# Altium PCB dieukhien.PcbDoc (part 3 of 3)
Units mil, origin at the board's own origin, x right, y up, seen from the top; angles counter-clockwise.
Board outline 7680 x 3350 mil, 2 copper layers (Top Layer, Bottom Layer); 551 components, 172 nets, 1771 pads, 0 vias.
Unrouted connection lines stored in the file: 181.
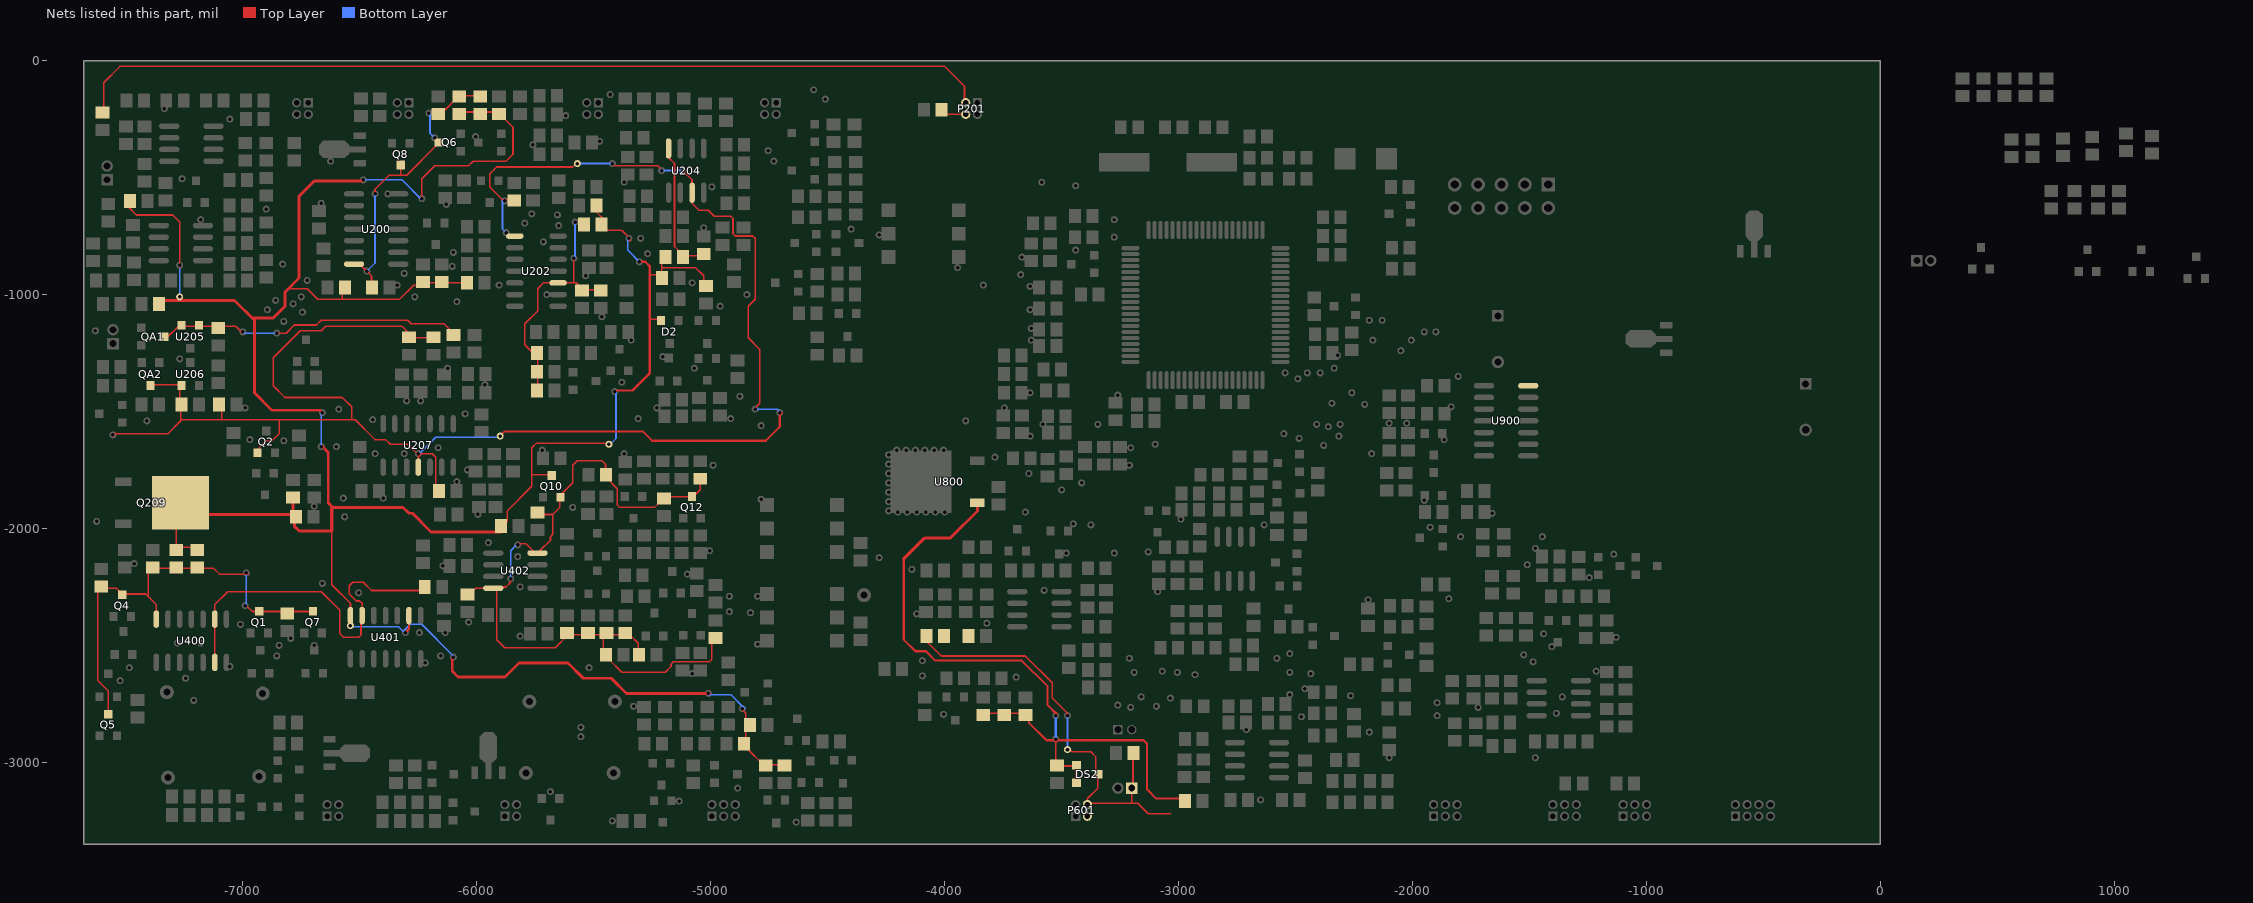
[diagram p3: the nets of this part, all layers, seen from the top]

## Nets (pads, with @x,y where several pads share a name; then routed paths per layer and width w, separated by ;. In a path a pad name is that pad's centre, name@x,y a point inside that pad or via, vN(x,y) a via of type N, cw(c..) or ccw(c..) an arc to the next point about the centre after c; other vN are vias at no path point) (continued)
U401-13: R61.1 U400.6 U400.9 U401.13 | length 1538.6
  Top Layer w7: U400.6@-7120,-2555 -7120,-2325 -7065,-2270 -6665,-2270 -6585,-2350 -6585,-2450 -6570,-2465 -6505,-2465 -6495,-2455 U401.13@-6495,-2400 ; U401.13@-6490,-2350 -6490,-2320 -6500,-2310 -6515,-2310 -6545,-2280 -6545,-2245 -6530,-2230 -6485,-2230 -6450,-2265 R61.1@-6240,-2265
V+1: P201.4 R277.1 | length 89.1
  Top Layer w7: R277.1@-4000,-220 -3990,-230 P201.4@-3915,-230
V+2: P201.3 R6.2 | length 3924.2
  Top Layer w7: R6.2@-7595,-205 -7595,-95 -7525,-25 -4000,-25 -3915,-110 P201.3@-3915,-180
VCC: C119.1 C636.1 DS2.3 P601.3 P601.4 pad.0@-3475,-2945 R187.2 U900.14 | length 1894.5
  Top Layer w7: R187.2@-4080,-2475 -4080,-2480 -4015,-2545 -3655,-2545 -3540,-2660 -3540,-2725 -3475,-2790 -3475,-2795 ; pad.0@-3475,-2935 -3455,-2955 -3375,-2955 -3355,-2975 DS2.3@-3355,-3045 ; P601.4@-3395,-3180 P601.4@-3390,-3175 ; DS2.3@-3345,-3050 -3345,-3110 -3390,-3155 P601.4@-3390,-3175 ; -3200,-3175 C636.1@-3200,-3115 ; C636.1@-3200,-3100 -3195,-3095 C119.1@-3195,-2965 ; -3035,-3220 -3130,-3220 -3175,-3175 P601.4@-3390,-3175
  Bottom Layer w6.5: P601.3@-3390,-3230 P601.4@-3390,-3175
  Bottom Layer w9: -3475,-2930 -3475,-2800
VCC12: C98.2 R187.1
VCC13: C118.2 DS2.1 DS2.2 R197.1 R198.1 R199.1 R210.2 U800.1 | length 3100.2
  Top Layer w7: R198.1@-3825,-2790 R197.1@-3655,-2790 ; C118.2@-3530,-3010 -3525,-3015 DS2.1@-3435,-3015 ; C118.2@-3525,-3010 -3525,-2905 ; DS2.2@-3440,-3090 DS2.1@-3440,-3010
  Top Layer w9: -4175,-2130 -4175,-2475 -4125,-2525 -4080,-2525 -4040,-2565 -3670,-2565 -3560,-2675 -3560,-2755 -3520,-2795 -3520,-2800 ; R197.1@-3640,-2800 -3640,-2830 -3565,-2905 -3425,-2905 -3150,-2905 -3135,-2920 -3135,-3115 -3095,-3155 R210.2@-2985,-3155
  Top Layer w13: -4175,-2130 -4085,-2040 -3975,-2040 -3860,-1925 U800.1@-3860,-1895
  Bottom Layer w9: -3525,-2900 -3525,-2800
VDD: C12.2 D2.2 pad.0@-5435,-1640 pad.0@-6540,-2415 pad.0@-7270,-1010 Q10.3 Q209.4 R8.1 R20.1 R29.1 R49.2 R50.2 R63.2 R67.1 R68.1 R69.1 R78.1 R79.1 R87.2 R88.1 R89.1 R99.2 R110.2 R111.2 R142.1 R143.2 R144.2 R145.2 R278.1 U401.9 U401.14 | length 11983.3
  Top Layer w7: R8.1@-7490,-605 -7490,-625 -7455,-660 -7300,-660 -7270,-690 -7270,-885 ; Q209.4@-7285,-1960 -7285,-2075 -7280,-2080 R50.2@-7205,-2080 ; -6800,-975 -6725,-975 -6680,-1020 -6330,-1020 -6270,-960 -6220,-960 -6210,-950 R87.2@-6045,-950 ; C12.2@-6785,-1940 C12.2@-6780,-1945 ; -6620,-1985 -6620,-2240 -6540,-2320 U401.14@-6540,-2350 ; -6575,-1020 R278.1@-6575,-980 ; -6235,-590 -6235,-505 -6180,-450 -6035,-450 -6015,-430 -5875,-430 -5845,-400 -5845,-285 -5910,-220 R67.1@-6055,-220 ; R63.2@-5895,-1995 -5870,-1970 -5870,-1925 -5765,-1820 -5765,-1655 -5745,-1635 pad.0@-5435,-1635 ; -5765,-1770 Q10.3@-5685,-1770 ; R78.1@-5490,-620 -5490,-645 -5455,-680 R79.1@-5455,-685 ; R79.1@-5455,-725 -5380,-725 -5345,-760 -5345,-770 ; -5260,-915 -5215,-915 -5210,-910 R99.2@-5210,-835 ; -5255,-1105 D2.2@-5210,-1105 ; -5210,-885 -5065,-885 -5030,-920 R111.2@-5030,-945 ; -4865,-2775 -4850,-2790 -4850,-2935 -4770,-3015 R144.2@-4770,-3020 ; R144.2@-4760,-3010 R145.2@-4695,-3010
  Top Layer w10: -6305,-2445 -6290,-2430 U401.9@-6290,-2380 ; -5405,-1410 -5335,-1410 -5260,-1335 -5260,-1105 -5260,-880 -5280,-860 -5295,-860
  Top Layer w12: R20.1@-7350,-1025 -7035,-1025 -6950,-1110 -6950,-1420 -6875,-1495 -6670,-1495 -6660,-1505 ; -6960,-1100 -6870,-1100 -6820,-1050 -6820,-990 -6760,-930 -6760,-580 -6695,-515 -6490,-515 ; -6660,-1650 -6635,-1675 -6635,-1890 -6615,-1910 -6315,-1910 -6290,-1935 -6275,-1935 -6195,-2015 R63.2@-5895,-2015 ; -6105,-2555 -6105,-2610 -6080,-2635 -5880,-2635 -5820,-2575 -5610,-2575 -5545,-2640 -5425,-2640 -5360,-2705 -5005,-2705
  Top Layer w13: Q209.4@-7160,-1925 -7145,-1940 -6785,-1940 R29.1@-6785,-1875 ; C12.2@-6780,-1975 -6780,-1990 -6760,-2010 -6620,-2010 -6620,-1910
  Bottom Layer w7: pad.0@-7270,-1005 -7270,-875 ; pad.0@-6540,-2420 -6335,-2420 -6310,-2445 -6310,-2435 -6285,-2410 -6235,-2410 -6100,-2545 -6100,-2555 ; -6490,-510 -6320,-510 -6235,-595 ; pad.0@-5435,-1645 -5405,-1615 -5405,-1410 ; -5355,-755 -5355,-810 -5305,-860 ; -5010,-2710 -4915,-2710 -4855,-2770
  Bottom Layer w7.87: -6665,-1650 -6665,-1505
VDD1: C19.1 C21.1 C23.2 Q1.3 Q4.3 Q5.3 Q7.3 R49.1 R50.1 U400.14 | length 1852.5
  Top Layer w7: C21.1@-7625,-2270 -7610,-2255 -7540,-2255 -7515,-2280 -7415,-2280 -7370,-2325 U400.14@-7370,-2370 ; C21.1@-7620,-2250 -7620,-2650 -7575,-2695 Q5.3@-7575,-2785 ; -7405,-2290 C19.1@-7405,-2175 ; C19.1@-7385,-2170 -7125,-2170 -7100,-2195 -6975,-2195 ; -6980,-2335 -6960,-2355 Q7.3@-6695,-2355
  Bottom Layer w7: -6985,-2325 -6985,-2190
VDD12: C33.1 C133.2 Q6.3 Q8.3 R67.2 R68.2 U200.14 | length 1091.7
  Top Layer w7: U200.14@-6500,-870 -6450,-920 C133.2@-6450,-960 ; -6435,-565 -6435,-550 -6375,-490 -6300,-490 -6170,-360 Q6.3@-6170,-350 ; -6325,-490 Q8.3@-6325,-450 ; C33.1@-6140,-210 -6135,-210 R67.2@-6095,-170 ; R67.2@-6065,-150 R68.2@-6000,-150
  Bottom Layer w7: -6465,-895 -6435,-865 -6435,-575 ; -6200,-225 -6200,-310 -6180,-330
VDD13: C48.1 R99.1 U204.8 | length 526.9
  Top Layer w7: U204.8@-5180,-415 -5155,-440 -5155,-795 -5140,-810 -5115,-835 C48.1@-5035,-835
VDD14: C37.2 R79.2 R81.2 R102.2 R103.2 R104.2 U202.3 | length 1046.3
  Top Layer w7: R104.2@-5740,-1410 -5740,-1270 -5795,-1215 -5795,-1125 -5740,-1070 -5740,-975 -5715,-950 U202.3@-5675,-950 ; U202.3@-5625,-955 -5620,-950 -5575,-950 R81.2@-5560,-965 ; R81.2@-5530,-985 -5525,-980 C37.2@-5470,-980 ; -5585,-950 -5585,-845 -5585,-950
  Bottom Layer w7: -5580,-840 -5580,-695
VDD15: C27.2 C52.1 C54.1 C57.1 Q10.2 Q12.3 R115.2 R117.1 R120.1 R121.1 R133.1 R134.2 R135.2 R279.2 U402.4 U402.8 | length 3222.5
  Top Layer w7: C27.2@-6035,-2285 -6005,-2255 U402.4@-5955,-2255 ; U402.4@-5915,-2255 -5915,-2475 -5880,-2510 -5665,-2510 -5610,-2455 -5345,-2455 -5310,-2490 R135.2@-5310,-2530 ; U402.4@-5900,-2250 -5875,-2250 -5855,-2230 -5855,-2220 ; -5820,-2065 -5790,-2065 U402.8@-5750,-2105 ; U402.8@-5735,-2100 -5685,-2050 -5685,-2035 -5675,-2025 -5675,-1940 ; R115.2@-5720,-1935 -5715,-1940 -5675,-1940 ; R134.2@-5460,-2530 R120.1@-5460,-2460 ; R134.2@-5440,-2560 -5435,-2560 -5380,-2615 -5205,-2615 -5195,-2615 -5170,-2590 -5170,-2580 -5160,-2570 -5005,-2570 -4995,-2560 -4995,-2495 -4985,-2485 R133.1@-4975,-2485 ; Q12.3@-5080,-1865 -5195,-1865 -5240,-1910 -5390,-1910 -5400,-1900 -5400,-1830 -5450,-1780 -5450,-1725 -5465,-1710 -5570,-1710 -5590,-1730 -5590,-1805 -5645,-1860 -5645,-1910 -5675,-1940 ; Q12.3@-5075,-1865 -5045,-1835 C57.1@-5045,-1795
  Bottom Layer w7: -5855,-2215 -5855,-2095 -5830,-2070
VREF1: C14.2 QA1.3 R46.2 U205.1 U205.2 | length 1300.8
  Top Layer w7: QA1.3@-7335,-1185 -7325,-1185 -7275,-1135 -7030,-1135 -7000,-1165 ; -6845,-1165 -6815,-1165 -6780,-1130 -6685,-1130 -6665,-1110 -6295,-1110 -6280,-1125 -6140,-1125 R46.2@-6095,-1170
  Bottom Layer w7: -6995,-1165 -6860,-1165
VREF2: C15.2 pad.0@-5570,-440 pad.0@-5900,-1605 Q2.1 QA2.3 R25.2 R35.2 R44.2 R45.2 R74.1 U202.8 U204.3 U206.1 U207.4 | length 7680.5
  Top Layer w7: -7555,-1605 -7545,-1595 -7320,-1595 -7265,-1540 ; QA2.3@-7390,-1385 -7275,-1385 -7270,-1390 -7270,-1480 -7265,-1485 -7265,-1540 ; -7090,-1535 C15.2@-7090,-1480 ; Q2.1@-6935,-1670 -6935,-1660 -6900,-1625 -6875,-1625 -6845,-1595 -6845,-1535 ; -6535,-1535 -6535,-1480 -6575,-1440 -6820,-1440 -6870,-1390 -6870,-1270 -6755,-1155 -6665,-1155 -6645,-1135 -6320,-1135 -6270,-1185 R45.2@-6185,-1185 ; U207.4@-6250,-1705 -6250,-1680 -6190,-1680 -6175,-1695 R35.2@-6175,-1825 ; -6245,-1690 -6295,-1640 -6370,-1640 -6390,-1620 -6435,-1620 -6520,-1535 -7265,-1535 -7265,-1540 ; R74.1@-5840,-595 -5890,-595 -5945,-540 -5945,-485 -5915,-455 -5590,-455 pad.0@-5575,-440 ; -5415,-450 -5225,-450 -5215,-460 ; -5120,-475 -5115,-475 -5080,-510 U204.3@-5080,-540 ; U204.3@-5080,-595 -5080,-610 -5050,-640 -5010,-640 -4985,-665 -4915,-665 -4905,-675 -4905,-740 -4895,-750 -4820,-750 -4810,-760 -4810,-915 -4810,-1020 -4840,-1050 -4840,-1185 -4790,-1235 -4790,-1465 -4815,-1490
  Top Layer w9: pad.0@-5900,-1605 -5880,-1585 -5290,-1585 -5250,-1625 -4765,-1625 -4705,-1565 -4705,-1515 -4695,-1505
  Bottom Layer w7: -6250,-1685 -6175,-1610 pad.0@-5905,-1610 ; -5890,-590 -5890,-720 -5875,-735 ; pad.0@-5565,-440 -5420,-440 ; -5215,-470 -5125,-470 -5120,-465 ; -4810,-1490 -4715,-1490 -4700,-1505
pads on no net: 1GM.1 1GM.2 1GM.3 C22.1 C24.2 C25.1 C25.2 C26.1 C26.2 C66.2 C71.1 C71.2 C72.1 C72.2 C73.1 C73.2 C74.1 C74.2 C75.1 C75.2 C76.1 C76.2 C77.1 C77.2 C78.1 C78.2 C79.1 C79.2 C80.1 C80.2 C81.1 C81.2 C82.1 C82.2 C83.1 C83.2 C84.1 C84.2 C85.1 C85.2 C86.1 C86.2 C87.1 C87.2 C88.1 C88.2 C89.1 C89.2 C90.1 C90.2 C91.1 C91.2 C92.1 C92.2 C93.1 C93.2 C94.1 C94.2 C95.1 C95.2 C96.1 C96.2 C97.1 C97.2 C99.1 C99.2 C100.1 C100.2 C101.1 C101.2 C102.1 C102.2 C103.1 C103.2 C104.1 C104.2 C105.1 C105.2 C106.1 C106.2 C107.1 C107.2 C108.1 C108.2 C109.1 C109.2 C110.1 C110.2 C111.1 C111.2 C112.1 C112.2 C113.1 C113.2 C114.1 C114.2 C115.1 C115.2 C116.1 C116.2 C117.1 C117.2 C120.1 C120.2 C121.1 C121.2 C122.1 C122.2 C123.1 C123.2 C124.1 C124.2 C125.1 C125.2 C126.1 C126.2 C127.1 C127.2 C128.1 C128.2 C129.1 C129.2 C130.1 C130.2 C131.1 C131.2 C132.1 C132.2 C134.1 C134.2 C135.1 C135.2 C136.1 C136.2 C137.1 C137.2 C138.1 C138.2 C139.1 C139.2 C635.1 C635.2 C820.1 C820.2 C903.1 C903.2 C906.1 C906.2 D3.1 D3.2 D3.3 D800.1 D800.2 DB1.1 DB1.2 DB1.3 DB4.1 DB4.2 DB4.3 DB5.1 DB5.2 DB5.3 DD1.1 DD1.2 DD1.3 DD4.1 DD4.2 DD4.3 DD5.1 DD5.2 DD5.3 DD6.1 DD6.2 DD6.3 DD8.1 DD8.2 DD8.3 DD9.1 DD9.2 DD9.3 DD10.1 DD10.2 DD10.3 DD11.1 DD11.2 DD11.3 DD12.1 DD12.2 DD12.3 DG1.1 DG1.2 DG1.3 DG2.1 DG2.2 DG2.3 DG3.1 DG3.2 DG3.3 DG4.1 DG4.2 DG5.1 DG5.2 DG5.3 DG6.1 DG6.2 DG6.3 DS3.1 DS3.2 DS3.3 DS4.1 DS4.2 DS4.3 DZ1.2 DZ2.2 DZ3.1 DZ3.2 DZ3.3 OC400.1 OC400.2 OC400.3 OC400.6 OC401.3 OC401.4 OC401.5 OC401.6 OC402.1 OC402.2 OC402.3 OC402.6 P200.1 P200.4 P204.2 P204.3 P400.1 P400.2 P400.3 P400.4 P401.1 P401.2 P401.3 P401.4 P600.1 P600.2 P600.3 P600.4 P600.5 P600.6 P602.1 P602.2 P602.3 P602.4 P602.5 P602.6 P603.1 P603.2 P603.3 P603.4 P603.5 P603.6 P604.1 P604.2 P604.3 P604.4 P604.5 P604.6 P604.7 P604.8 P900.1 P900.2 P900.3 P900.4 P900.5 P900.6 P900.7 P900.8 P900.9 P900.10 Q17.1 Q17.2 Q17.3 q203.0 Q400.0 Q400.1 Q400.2 Q400.3 Q401.0 Q401.1 Q401.2 Q401.3 Q900.0 Q900.1 Q900.2 Q900.3 Q908.0 Q908.1 Q908.2 Q908.3 QA15.2 QA17.2 QA20.1 QA20.2 QA20.3 QA21.1 QA21.2 QA21.3 QA22.1 QA22.2 QA22.3 R51.1 R51.2 R52.1 R52.2 R53.1 R53.2 R54.1 R54.2 R55.1 R55.2 R56.1 R56.2 R57.1 R57.2 R58.1 R59.2 R60.1 R60.2 R154.1 R154.2 R159.1 R159.2 R160.1 R160.2 R161.1 R161.2 R162.1 R162.2 R163.1 R163.2 R164.1 R164.2 R165.1 R165.2 R166.1 R166.2 R167.1 R167.2 R168.1 R168.2 R169.1 R169.2 R170.1 R170.2 R171.1 R171.2 R172.1 R172.2 R173.1 R173.2 R174.1 R174.2 R175.1 R175.2 R176.1 R176.2 R177.1 R177.2 R178.1 R178.2 R179.1 R179.2 R180.1 R180.2 R181.1 R181.2 R182.1 R182.2 R183.1 R183.2 R184.1 R184.2 R185.1 R185.2 R186.1 R186.2 R188.1 R188.2 R189.1 R189.2 R190.1 R190.2 R191.1 R191.2 R192.1 R192.2 R193.1 R193.2 R194.1 R194.2 R195.1 R195.2 R196.1 R196.2 R197.2 R198.2 R199.2 R200.1 R200.2 R201.1 R201.2 R202.1 R202.2 R203.1 R203.2 R204.1 R204.2 R205.1 R205.2 R206.1 R206.2 R207.1 R207.2 R208.1 R208.2 R209.1 R209.2 R210.1 R211.1 R211.2 R212.1 R212.2 R213.1 R213.2 R214.1 R214.2 R215.1 R215.2 R216.1 R216.2 R217.1 R217.2 R218.1 R218.2 R219.1 R219.2 R220.1 R220.2 R221.1 R221.2 R222.1 R222.2 R223.1 R223.2 R224.1 R224.2 R225.1 R225.2 R226.1 R226.2 R227.1 R227.2 R228.1 R228.2 R229.1 R229.2 R230.1 R230.2 R231.1 R231.2 R232.1 R232.2 R233.1 R233.2 R234.1 R234.2 R235.1 R235.2 R236.1 R236.2 R237.1 R237.2 R238.1 R238.2 R239.1 R239.2 R240.1 R240.2 R241.1 R241.2 R242.1 R242.2 R243.1 R243.2 R244.1 R244.2 R245.1 R245.2 R246.1 R246.2 R247.1 R247.2 R248.1 R248.2 R249.1 R249.2 R250.1 R250.2 R251.1 R251.2 R252.1 R252.2 R253.1 R253.2 R254.1 R254.2 R255.1 R255.2 R256.1 R256.2 R257.1 R257.2 R258.1 R258.2 R259.1 R259.2 R260.1 R260.2 R261.1 R261.2 R262.1 R262.2 R263.1 R263.2 R264.1 R264.2 R265.1 R265.2 R266.1 R266.2 R267.1 R267.2 R268.1 R268.2 R269.1 R269.2 R270.1 R270.2 R271.1 R271.2 R272.1 R272.2 R273.1 R273.2 R274.1 R274.2 R275.1 R275.2 R276.1 R276.2 R281.1 R281.2 R282.1 R282.2 R283.1 R283.2 R284.1 R284.2 U401.12 U600.1 U600.2 U600.3 U600.4 U600.5 U600.6 U600.7 U600.8 U601.1 U601.2 U601.3 U601.4 U601.5 U601.6 U601.7 U601.8 U602.1 U602.2 U602.3 U602.4 U602.5 U602.6 U602.7 U602.8 U603.1 U603.2 U603.3 U603.4 U603.5 U603.6 U603.7 U603.8 u604.1 u604.2 u604.3 u605.1 u605.2 u605.3 U800.2 U800.3 U801.1 U801.2 U801.3 U801.4 U801.5 U801.6 U801.7 U801.8 U801.9 U801.10 U801.11 U801.12 U801.13 U801.14 U801.15 U801.16 U801.17 U801.18 U801.19 U801.20 U801.21 U801.22 U801.23 U801.24 U801.25 U801.26 U801.27 U801.28 U801.29 U801.30 U801.31 U801.32 U801.33 U801.34 U801.35 U801.36 U801.37 U801.38 U801.39 U801.40 U801.41 U801.42 U801.43 U801.44 U801.45 U801.46 U801.47 U801.48 U801.49 U801.50 U801.51 U801.52 U801.53 U801.54 U801.55 U801.56 U801.57 U801.58 U801.59 U801.60 U801.61 U801.62 U801.63 U801.64 U801.65 U801.66 U801.67 U801.68 U801.69 U801.70 U801.71 U801.72 U801.73 U801.74 U801.75 U801.76 U801.77 U801.78 U801.79 U801.80 U803.1 U803.2 U803.3 U900.1 U900.2 U900.3 U900.4 U900.5 U900.6 U900.8 U900.9 U900.10 U900.11 U900.12 U900.13 XT800.1 XT800.2
copper on no net: | length 101983.8
  Top Layer w7: -7455,-2805 -7220,-2805 -7115,-2700 -6915,-2700 ; -7340,-3075 -7320,-3075 -7305,-3090 -7305,-3125 ; -7340,-3065 -7335,-3070 -7030,-3070 -6875,-2915 -6840,-2915 -6840,-2835 ; -7305,-3205 -7305,-3150 ; -7235,-3220 -7230,-3215 -7230,-3150 ; -7220,-3220 -7170,-3220 ; -7215,-3155 -7155,-3155 ; -7070,-3150 -7025,-3150 ; -7060,-3225 -7015,-3225 ; -7020,-3215 -7015,-3220 ; -7020,-3150 -7015,-3145 ; -6915,-3190 -6860,-3190 ; -6855,-3065 -6855,-3005 -6840,-2990 -6790,-2990 -6760,-2960 -6760,-2840 ; -6850,-3185 -6850,-3150 -6810,-3110 -6625,-3110 -6580,-3155 -6580,-3185 ; -6770,-3225 -6770,-3150 ; -6755,-3035 -6750,-3035 -6675,-2960 -6645,-2960 ; -6755,-2905 -6645,-2905 -6640,-2900 ; -6750,-3235 -6640,-3235 ; -6750,-3160 -6660,-3160 -6640,-3180 ; -6650,-2620 -6605,-2620 -6540,-2685 -6540,-2710 ; -6650,-2615 -6650,-2460 ; -6640,-3110 -6640,-3025 ; -6410,-3245 -6410,-3175 -6410,-3055 -6365,-3010 -6275,-3010 -6265,-3000 -6265,-2960 -6255,-2950 -6115,-2950 -6055,-2890 -6055,-2855 -6020,-2820 -5845,-2820 -5805,-2860 -5805,-3010 -5777.5,-3037.5 ; -6335,-3165 -6335,-3240 -6330,-3235 ; -6325,-3155 -6275,-3155 -6265,-3165 ; -6325,-3085 -6185,-3085 -6185,-3020 -6190,-3015 ; -6320,-3250 -6230,-3250 ; -6185,-3095 -6025,-3095 -5995,-3065 -5995,-3060 ; -6170,-3250 -6105,-3250 -6100,-3245 ; -6170,-3175 -6110,-3175 -6105,-3180 ; -6090,-3040 -6090,-3000 -6020,-2930 -5935,-2930 ; -6010,-3215 -6010,-3180 -5960,-3130 -5850,-3130 -5825,-3155 -5825,-3180 ; -5880,-3130 -5880,-3065 ; -5725,-3135 -5640,-3135 ; -4745,-2660 -4720,-2660 -4705,-2675 -4705,-2870 -4665,-2910 -4665,-2915 ; -4575,-2915 -4575,-2950 -4570,-2955 -4540,-2955 -4505,-2990 -4470,-2990 ; -4465,-1990 -4465,-1905 ; -4455,-2095 -4405,-2145 -4305,-2145 -4280,-2120 ; -4450,-2485 -4320,-2485 -4265,-2540 -4265,-2600 ; -4450,-2295 -4450,-2375 -4425,-2400 -4370,-2400 ; -4450,-2005 -4435,-2005 -4390,-2050 ; -4350,-2055 -4350,-2020 -4300,-1970 -3970,-1970 -3950,-1950 -3950,-1440 -3865,-1355 -3865,-755 -3835,-725 -3835,-630 -3690,-485 -3600,-485 -3575,-460 -3575,-345 ; -4160,-2590 -4155,-2595 -3680,-2595 -3605,-2670 -3580,-2695 -3580,-2795 -3535,-2840 -3440,-2840 -3425,-2825 -3170,-2825 -3115,-2880 -3115,-3090 -3095,-3110 -2910,-3110 -2815,-3015 -2760,-3015 ; -4145,-2175 -4145,-2165 -4045,-2065 -3965,-2065 -3900,-2000 -3780,-2000 -3675,-1895 -3350,-1895 -3315,-1860 -3205,-1860 -2910,-1565 -2625,-1565 -2575,-1515 -2305,-1515 -2230,-1590 -2230,-1630 -2230,-1750 -2140,-1840 -2125,-1840 ; -4130,-2365 -4075,-2365 -3990,-2365 ; -4095,-2630 -4100,-2630 -4150,-2680 -4150,-2830 -4110,-2870 -3655,-2870 -3595,-2930 -3595,-3130 -3500,-3225 -3500,-3270 -3485,-3285 -3285,-3285 -3245,-3245 -3055,-3245 ; -4090,-2560 -4130,-2560 -4215,-2475 -4215,-2110 -4115,-2010 -3980,-2010 -3930,-1960 -3930,-1600 -3915,-1585 -3915,-1535 ; -4085,-2795 -3985,-2795 -3965,-2815 ; -4075,-2275 -4075,-2185 ; -4070,-2720 -4000,-2720 ; -4070,-2155 -4010,-2095 -3900,-2095 ; -4010,-2465 -3915,-2465 -3865,-2515 -3745,-2515 -3685,-2455 -3685,-2420 ; -4005,-2275 -4000,-2280 -3915,-2280 ; -4005,-2270 -4005,-2165 ; -4000,-2715 -4000,-2655 ; -3925,-2710 -3925,-2650 ; -3925,-735 -3920,-735 -3865,-680 -3865,-610 -3705,-450 -3625,-450 -3610,-435 -3610,-345 ; -3910,-2650 -3840,-2650 ; -3905,-2170 -3905,-2085 ; -3900,-2355 -3835,-2290 ; -3840,-2295 -3840,-2285 ; -3830,-960 -3830,-1380 -3870,-1420 -3870,-1605 -3910,-1645 -3910,-1740 -3900,-1750 -3825,-1750 -3800,-1775 -3715,-1775 -3645,-1845 -3505,-1845 -3495,-1835 ; -3825,-2645 -3825,-2725 -3820,-2720 -3670,-2720 ; -3825,-2090 -3740,-2090 ; -3820,-2445 -3820,-2375 ; -3795,-2270 -3710,-2270 ; -3795,-1690 -3795,-1685 -3800,-1680 -3800,-1565 -3755,-1520 ; -3755,-1655 -3715,-1655 -3500,-1655 -3485,-1670 -3480,-1670 ; -3750,-2630 -3700,-2630 ; -3750,-1885 -3745,-1885 ; -3745,-1250 -3745,-1075 -3775,-1045 -3775,-770 -3775,-660 -3675,-560 -3570,-560 -3545,-535 -3545,-345 ; -3730,-1615 -3725,-1615 -3705,-1635 -3505,-1635 -3480,-1610 ; -3725,-2175 -3820,-2175 -3860,-2135 -3860,-2040 -3845,-2025 -3770,-2025 -3705,-1960 -3635,-1960 -3600,-1925 -3215,-1925 -2925,-1635 -2840,-1635 -2810,-1605 -2565,-1605 -2560,-1600 ; -3685,-2365 -3685,-2320 ; -3675,-2010 -3555,-2010 ; -3675,-915 -3670,-915 -3660,-905 -3500,-905 -3490,-915 -3355,-915 -3275,-835 -3275,-750 ; -3670,-1515 -3670,-1500 -3630,-1460 -3515,-1460 -3490,-1435 -3475,-1435 -3425,-1385 -3425,-1250 -3335,-1160 -3230,-1160 ; -3670,-1335 -3670,-1265 ; -3665,-1415 -3585,-1415 -3570,-1400 -3570,-1320 ; -3660,-2315 -3635,-2315 -3605,-2345 -3605,-2555 -3515,-2645 -3515,-2705 -3465,-2755 -3270,-2755 ; -3655,-1920 -3620,-1920 -3610,-1910 -3225,-1910 -2925,-1610 -2880,-1610 -2855,-1585 -2600,-1585 -2560,-1545 -2485,-1545 -2430,-1600 -2430,-1640 -2355,-1715 -2355,-1805 -2390,-1840 ; -3655,-1270 -3650,-1275 -3525,-1275 -3490,-1310 ; -3650,-2100 -3585,-2100 -3570,-2115 -3570,-2160 ; -3630,-2200 -3630,-2205 -3560,-2275 -3315,-2275 ; -3625,-775 -3625,-720 ; -3620,-1710 -3545,-1710 ; -3605,-780 -3550,-780 ; -3600,-1215 -3600,-1155 ; -3575,-1575 -3560,-1590 -3560,-1510 ; -3555,-905 -3555,-870 ; -3540,-2370 -3550,-2370 -3565,-2385 -3565,-2485 -3545,-2505 -3490,-2505 -3480,-2515 -3390,-2515 ; -3540,-690 -3475,-690 -3445,-660 ; -3520,-1235 -3520,-1170 -3520,-1135 -3550,-1105 -3665,-1105 -3750,-1020 -3750,-785 -3750,-675 -3665,-590 -3550,-590 -3520,-560 -3520,-370 ; -3520,-955 -3520,-940 -3535,-925 -3640,-925 -3665,-950 -3695,-950 -3710,-935 -3710,-820 -3710,-695 -3650,-635 -3525,-635 -3470,-580 -3470,-370 ; -3515,-1050 -3550,-1015 -3670,-1015 -3730,-955 -3730,-800 -3730,-685 -3660,-615 -3535,-615 -3495,-575 -3495,-370 ; -3510,-1135 -3510,-1165 -3420,-1165 -3365,-1110 -3230,-1110 ; -3505,-1055 -3480,-1055 -3450,-1085 -3230,-1085 ; -3505,-975 -3505,-1000 -3445,-1060 -3230,-1060 ; -3500,-2105 -3480,-2105 ; -3500,-1305 -3480,-1305 -3455,-1280 -3455,-1235 -3355,-1135 -3240,-1135 ; -3500,-690 -3500,-825 -3460,-865 ; -3480,-2425 -3435,-2470 -3275,-2470 -3240,-2435 -3240,-2035 -3130,-1925 -3125,-1925 ; -3480,-1590 -3480,-1530 ; -3470,-2595 -3470,-2620 -3402.5,-2687.5 ; -3470,-2005 -3470,-2000 -3450,-1980 ; -3470,-1685 -3450,-1685 -3395,-1740 -3385,-1740 ; -3465,-2325 -3415,-2325 -3410,-2330 ; -3465,-2195 -3460,-2195 -3435,-2220 -3350,-2220 -3325,-2195 ; -3460,-1510 -3450,-1510 -3395,-1455 -3395,-1260 -3320,-1185 -3240,-1185 -3235,-1190 ; -3445,-745 -3445,-805 -3415,-835 -3365,-835 ; -3410,-365 -3410,-585 -3385,-610 -3335,-610 -3275,-670 -3275,-680 ; -3405,-1665 -3405,-1635 -3410,-1630 -3410,-1510 -3365,-1465 -3365,-1260 -3315,-1210 -3230,-1210 ; -3395,-2425 -3395,-2350 ; -3390,-2510 -3390,-2505 -3385,-2510 -3385,-2595 ; -3385,-2170 -3385,-2150 -3415,-2120 -3415,-1980 -3395,-1960 -3220,-1960 -2925,-1665 -2825,-1665 -2805,-1645 -2785,-1625 -2525,-1625 -2485,-1625 ; -3375,-1985 -3375,-2095 -3365,-2105 -3275,-2105 ; -3370,-1655 -3315,-1655 ; -3355,-675 -3310,-720 -3135,-720 ; -3350,-755 -3280,-755 -3205,-755 ; -3315,-2590 -3315,-2520 ; -3310,-2175 -3295,-2175 -3260,-2210 -3260,-2315 -3285,-2340 ; -3310,-1745 -3255,-1745 -3250,-1740 ; -3300,-2685 -3225,-2685 -3190,-2720 -3165,-2720 -3160,-2715 ; -3300,-2405 -3300,-2350 ; -3295,-2620 -3290,-2620 -3265,-2645 -3170,-2645 -3155,-2630 ; -3292.5,-1542.5 -3320,-1515 -3320,-1275 -3305,-1260 -3235,-1260 ; -3230,-1650 -3235,-1650 -3275,-1610 -3350,-1610 -3390,-1570 -3390,-1530 -3340,-1480 -3340,-1270 -3305,-1235 -3230,-1235 ; -3205,-2550 -3180,-2525 -3180,-2075 -3155,-2050 -3085,-2050 -3060,-2075 -3060,-2085 ; -3200,-2765 -3195,-2760 -3095,-2760 ; -3195,-2615 -3245,-2615 -3265,-2595 -3265,-2495 -3220,-2450 -3220,-2050 -3150,-1980 -3120,-1980 -3090,-1950 -3090,-1870 -2910,-1690 -2765,-1690 ; -3125,-2565 -3080,-2565 -3070,-2555 -3070,-2530 ; -3125,-2110 -3130,-2110 -3140,-2120 -3140,-2550 -3105,-2585 -3105,-2630 -3075,-2660 -2940,-2660 -2915,-2685 -2590,-2685 -2527.5,-2622.5 ; -3100,-2155 -3100,-2145 -3100,-2080 -3110,-2070 -3145,-2070 -3160,-2085 -3160,-2560 -3130,-2590 -3130,-2640 -3090,-2680 -2960,-2680 -2935,-2705 -2655,-2705 -2635,-2725 -2625,-2725 ; -3095,-2165 -3010,-2165 ; -3095,-2010 -3150,-2010 -3200,-2060 -3200,-2490 -3245,-2535 -3245,-2570 -3230,-2585 -3170,-2585 -3155,-2600 -3155,-2630 ; -3095,-1640 -3060,-1640 -2945,-1525 -2665,-1525 -2610,-1470 -2345,-1470 ; -3070,-2610 -3030,-2570 -2850,-2570 ; -3050,-1920 -3050,-2005 -3015,-2040 -2875,-2040 -2865,-2050 -2865,-2090 -2840,-2115 -2705,-2115 -2690,-2100 -2690,-2065 ; -3010,-2615 -2985,-2590 -2855,-2590 -2800,-2645 -2625,-2645 -2595,-2615 -2595,-2570 -2580,-2555 ; -3005,-2510 -3005,-2430 ; -3005,-2345 -3045,-2305 -3045,-2205 -3040,-2200 -2950,-2200 -2935,-2215 -2935,-2220 ; -3000,-2255 -2925,-2330 -2925,-2340 ; -2990,-2070 -2945,-2070 -2930,-2085 -2930,-2160 ; -2990,-1845 -2990,-1960 -2945,-2005 -2835,-2005 ; -2985,-2890 -2970,-2890 -2925,-2845 -2870,-2845 -2835,-2880 -2835,-2910 -2805,-2940 -2710,-2940 -2615,-2845 -2610,-2845 ; -2970,-2755 -3000,-2755 -3040,-2715 -3100,-2715 -3155,-2660 -3155,-2630 ; -2955,-2970 -2955,-2965 -2905,-2915 -2905,-2905 ; -2935,-2235 -2850,-2235 ; -2930,-2350 -2840,-2350 ; -2920,-2625 -2920,-2635 -2890,-2665 -2605,-2665 -2570,-2630 -2570,-2600 -2540,-2570 -2495,-2570 -2475,-2550 -2385,-2550 -2335,-2500 -2335,-2460 ; -2920,-2505 -2920,-2435 ; -2920,-1775 -2920,-1915 -2865,-1970 -2810,-1970 -2780,-2000 ; -2885,-2910 -2830,-2965 -2780,-2965 ; -2885,-2750 -2785,-2750 ; -2850,-2520 -2850,-2570 ; -2850,-2505 -2850,-2430 ; -2840,-2355 -2800,-2355 -2790,-2365 -2790,-2455 -2750,-2495 -2750,-2585 ; -2835,-1925 -2835,-1845 ; -2830,-1845 -2765,-1780 ; -2825,-2340 -2790,-2305 -2790,-2255 ; -2825,-1755 -2800,-1730 -2705,-1730 -2695,-1720 -2695,-1660 -2680,-1645 -2455,-1645 -2415,-1685 -2415,-1745 -2410,-1750 ; -2810,-1945 -2785,-1970 -2775,-1970 -2740,-2005 -2740,-2010 ; -2790,-2745 -2790,-2810 -2770,-2830 -2770,-2905 ; -2785,-2180 -2750,-2145 -2580,-2145 ; -2745,-1910 -2745,-1835 -2740,-1840 ; -2740,-2250 -2740,-2325 -2720,-2345 -2665,-2345 -2655,-2335 -2580,-2335 ; -2720,-1760 -2690,-1730 -2610,-1730 -2590,-1710 -2575,-1710 ; -2715,-2840 -2715,-2740 ; -2685,-2580 -2685,-2510 -2675,-2500 ; -2685,-2490 -2685,-2435 ; -2685,-2205 -2570,-2205 -2540,-2175 -2540,-2115 -2575,-2080 -2575,-2020 -2570,-2015 -2505,-2015 ; -2685,-2010 -2685,-1960 -2605,-1880 -2595,-1880 ; -2670,-1390 -2670,-1415 -2640,-1445 -2375,-1445 -2365,-1435 -2325,-1435 -2180,-1580 -2180,-1675 ; -2655,-1670 -2650,-1675 -2535,-1675 -2535,-1985 -2530,-1990 -2440,-1990 -2425,-2005 -2425,-2320 -2335,-2410 -2335,-2455 ; -2650,-1295 -2610,-1335 -2610,-1390 -2575,-1425 -2405,-1425 -2395,-1415 -2315,-1415 -2275,-1455 -2240,-1455 -2205,-1420 -2205,-1395 -2105,-1295 -2035,-1295 -1950,-1210 -1875,-1210 -1860,-1195 -1860,-1125 ; -2640,-1765 -2625,-1765 -2590,-1800 ; -2635,-1980 -2615,-1960 -2590,-1960 ; -2635,-1285 -2590,-1330 -2590,-1380 -2565,-1405 -2430,-1405 -2415,-1390 -2285,-1390 -2280,-1385 -2260,-1385 -2030,-1155 -1950,-1155 ; -2615,-2815 -2600,-2815 -2580,-2795 -2580,-2710 -2525,-2655 -2500,-2655 -2480,-2635 -2480,-2605 -2455,-2580 -2400,-2580 -2260,-2580 ; -2600,-3065 -2630,-3065 -2660,-3035 -2660,-2930 -2615,-2885 -2570,-2885 -2545,-2860 -2545,-2745 ; -2580,-2245 -2580,-2365 -2570,-2375 -2540,-2375 -2530,-2385 -2530,-2455 -2515,-2470 -2465,-2470 -2425,-2430 -2425,-2420 ; -2565,-2415 -2565,-2485 -2550,-2500 -2510,-2500 -2480,-2530 -2480,-2555 ; -2550,-3015 -2505,-3015 -2470,-2980 -2455,-2980 ; -2545,-2920 -2535,-2920 -2480,-2865 -2480,-2805 -2465,-2790 -2420,-2790 ; -2545,-1340 -2545,-1365 -2520,-1390 -2455,-1390 -2435,-1370 -2305,-1370 -2295,-1360 -2270,-1360 -2035,-1125 -1925,-1125 -1895,-1155 ; -2540,-3060 -2470,-3060 -2455,-3045 ; -2540,-2965 -2510,-2965 -2485,-2940 -2420,-2940 -2400,-2960 -2400,-3015 -2360,-3055 -2360,-3070 ; -2540,-1235 -2535,-1240 -2480,-1240 -2470,-1250 -2470,-1315 -2455,-1330 ; -2535,-1285 -2500,-1285 -2490,-1295 -2490,-1350 ; -2530,-2535 -2545,-2520 -2595,-2520 -2630,-2555 -2630,-2610 -2645,-2625 -2795,-2625 -2850,-2570 ; -2530,-2340 -2530,-2220 -2495,-2185 -2495,-2115 ; -2490,-2400 -2490,-2255 ; -2490,-1945 -2465,-1945 -2405,-1885 -2405,-1855 ; -2490,-1835 -2490,-1745 ; -2485,-1740 -2485,-1675 ; -2475,-3180 -2455,-3180 -2410,-3225 -2310,-3225 -2265,-3180 ; -2437.5,-3007.5 -2405,-3040 -2405,-3115 -2360,-3160 ; -2430,-2620 -2345,-2620 -2265,-2700 -2265,-2710 ; -2405,-1550 -2405,-1565 -2305,-1665 -2305,-2166.72 -2241.72,-2230 -2050,-2230 -1975,-2155 -1850,-2155 ; -2390,-1345 -2285,-1345 -2175,-1235 -2175,-1195 ; -2375,-1650 -2330,-1695 -2330,-2180 -2255,-2255 -2035,-2255 -1965,-2185 -1835,-2185 -1810,-2210 -1810,-2320 -1820,-2330 -1820,-2640 ; -2355,-1565 -2280,-1640 -2280,-2150 -2230,-2200 -2060,-2200 -1900,-2040 -1840,-2040 -1825,-2055 -1825,-2115 -1765,-2175 -1765,-2525 -1745,-2545 -1530,-2545 ; -2350,-2885 -2345,-2880 -2345,-2705 ; -2340,-2790 -2255,-2790 -2250,-2785 ; -2330,-2970 -2330,-2965 -2260,-2895 -2260,-2885 ; -2330,-2455 -2275,-2455 -2230,-2500 -2230,-2690 -2185,-2735 -2185,-2865 ; -2320,-1310 -2260,-1250 -2255,-1250 -2210,-1205 -2210,-1180 -2180,-1150 -2120,-1150 -2040,-1070 ; -2310,-1555 -2255,-1610 -2255,-1810 -2150,-1915 -2060,-1915 -1980,-1995 -1930,-1995 ; -2295,-1495 -2205,-1585 -2205,-1705 -2190,-1720 -1800,-1720 -1690,-1830 -1650,-1830 -1520,-1960 -1520,-2150 ; -2270,-3075 -2185,-3075 ; -2260,-3165 -2185,-3165 ; -2255,-3065 -2255,-2975 ; -2255,-1410 -2085,-1240 -2055,-1240 ; -2250,-2865 -2250,-2885 -2190,-2945 -2085,-2945 ; -2210,-1465 -2205,-1465 -2185,-1445 -2185,-1405 -2105,-1325 -2025,-1325 -1935,-1235 -1855,-1235 -1835,-1215 -1835,-1105 ; -2190,-2410 -2110,-2410 ; -2175,-2560 -2155,-2540 -2020,-2540 -2020,-2335 ; -2115,-3085 -2115,-3095 -2145,-3125 -2145,-3200 -2145,-3215 -2135,-3225 -2030,-3225 -1970,-3285 -1890,-3285 -1880,-3285 -1860,-3265 -1860,-3235 ; -2115,-1430 -1995,-1430 -1950,-1385 -1950,-1330 -1920,-1300 -1830,-1300 -1785,-1255 -1785,-1080 ; -2110,-2750 -2110,-2660 ; -2110,-2575 -2110,-2650 -2105,-2655 ; -2110,-1585 -2110,-1515 ; -2105,-2870 -2105,-2770 ; -2105,-2500 -2105,-2335 ; -2100,-3165 -2020,-3165 -1985,-3130 -1870,-3130 -1865,-3135 -1865,-3175 ; -2100,-1755 -2095,-1760 -1870,-1760 -1745,-1885 -1640,-1885 -1610,-1915 -1610,-2015 ; -2045,-1825 -1975,-1825 -1945,-1855 -1945,-1920 ; -2040,-1590 -2030,-1580 -2030,-1510 ; -2020,-2340 -1935,-2340 ; -2015,-1590 -1955,-1590 ; -1955,-2410 -1955,-2500 -1945,-2510 ; -1950,-2585 -1950,-2600 -2030,-2680 -2030,-2890 -1835,-3085 -1690,-3085 -1595,-3180 -1400,-3180 -1405,-3185 -1405,-3230 ; -1945,-1525 -1945,-1530 -1910,-1565 -1910,-1680 -1905,-1685 ; -1930,-2405 -1925,-2405 -1880,-2360 -1880,-2305 -1920,-2265 ; -1910,-1690 -1950,-1690 -1975,-1665 -2135,-1665 -2155,-1645 -2155,-1410 -2100,-1355 -2015,-1355 -1920,-1260 -1835,-1260 -1810,-1235 -1810,-1090 ; -1890,-2800 -1865,-2800 -1820,-2845 -1815,-2845 ; -1890,-2740 -1890,-2715 -1865,-2690 -1795,-2690 -1785,-2680 -1785,-2610 -1780,-2605 -1430,-2605 -1400,-2635 -1400,-2725 -1330,-2795 -1320,-2795 ; -1870,-2080 -1870,-2135 -1850,-2155 ; -1870,-2005 -1870,-1940 ; -1865,-1935 -1770,-1935 ; -1860,-1370 -1840,-1350 -1815,-1350 ; -1810,-2905 -1745,-2840 -1735,-2840 ; -1805,-2715 -1800,-2715 -1740,-2655 -1730,-2655 ; -1800,-2030 -1800,-2100 -1735,-2165 -1735,-2345 -1700,-2380 ; -1765,-1950 -1765,-1955 -1710,-2010 ; -1730,-2735 -1730,-2745 -1665,-2810 -1650,-2810 -1585,-2745 ; -1730,-2665 -1725,-2665 -1675,-2715 ; -1710,-2925 -1670,-2925 ; -1695,-2090 -1695,-2155 -1660,-2190 ; -1685,-2460 -1525,-2460 -1435,-2550 -1080,-2550 -995,-2635 -995,-3000 -1045,-3050 -1045,-3085 ; -1660,-2280 -1660,-2320 -1610,-2370 ; -1655,-2640 -1590,-2640 ; -1650,-2950 -1615,-2985 -1550,-2985 -1530,-2965 -1530,-2790 -1500,-2760 -1500,-2755 ; -1605,-2105 -1605,-2155 -1560,-2200 ; -1580,-2920 -1580,-2825 ; -1565,-2810 -1575,-2800 -1530,-2755 -1530,-2715 -1515,-2700 -1500,-2700 ; -1560,-2285 -1560,-2315 -1515,-2360 ; -1490,-2580 -1755,-2580 -1790,-2545 -1790,-2185 -1820,-2155 -1850,-2155 ; -1475,-2975 -1475,-2925 ; -1460,-2205 -1460,-2230 -1420,-2270 -1420,-2300 -1455,-2335 -1455,-2435 -1445,-2445 ; -1450,-2800 -1390,-2860 -1390,-2905 ; -1440,-2180 -1430,-2180 -1410,-2160 -1410,-2075 -1380,-2045 -930,-2045 ; -1440,-2030 -1430,-2030 -1425,-2025 -790,-2025 ; -1405,-2905 -1325,-2905 ; -1385,-2795 -1385,-2805 -1345,-2845 -1085,-2845 ; -1385,-2135 -1375,-2135 ; -1380,-2110 -1380,-2095 -1355,-2070 -915,-2070 ; -1360,-2185 -1300,-2125 ; -1355,-2725 -1345,-2725 -1315,-2755 ; -1345,-3100 -1345,-3120 -1295,-3170 -1295,-3235 ; -1335,-2395 -1335,-2320 ; -1325,-2285 -1255,-2285 -1260,-2290 -1260,-2375 ; -1285,-3085 -1170,-2970 -1170,-2865 ; -1285,-2200 -1050,-2200 ; -1275,-2110 -1045,-2110 ; -1255,-2705 -1250,-2700 -1090,-2700 ; -1255,-2460 -1160,-2460 ; -1250,-2640 -1225,-2615 -1100,-2615 ; -1245,-2795 -1205,-2795 -1185,-2775 -1085,-2775 ; -1180,-2300 -1135,-2300 -830,-2605 -830,-3115 -770,-3175 -620,-3175 ; -1160,-2400 -1085,-2400 -865,-2620 -865,-3160 -810,-3215 -635,-3215 ; -1130,-3090 -1130,-3075 -1020,-2965 -1020,-2745 -1075,-2690 ; -1105,-3220 -1105,-3160 -1060,-3115 -1060,-3080 ; -1105,-2160 -1015,-2160 -965,-2210 -780,-2210 -725,-2155 -610,-2155 ; -950,-2155 -940,-2155 -910,-2125 -585,-2125
  Top Layer w9: -3835,-1705 -3825,-1705 -3775,-1755 -3700,-1755 -3635,-1820 -3575,-1820 -3535,-1780 ; -3745,-1885 -3735,-1875 -3370,-1875 -3330,-1835 -3210,-1835 -2920,-1545 -2645,-1545 -2595,-1495 -2295,-1495 ; -3695,-1715 -3695,-1720 -3650,-1765 ; -3645,-2725 -3615,-2725 -3600,-2740 -3600,-2810 -3550,-2860 -3265,-2860 ; -3545,-1760 -3490,-1760 ; -3465,-1785 -3460,-1790 -3460,-1825 -3445,-1840 -3385,-1840 -3355,-1810 -3215,-1810 -3140,-1735 -3140,-1610 -3170,-1580 -3170,-1555 ; -3415,-1805 -3410,-1805 -3385,-1780 -3215,-1780 -3160,-1725 -3160,-1645 -3215,-1590 -3320,-1590 -3352.5,-1557.5 ; -3170,-1565 -3170,-1535 ; -3150,-1600 -3060,-1600 -2990,-1530 -2990,-1505 -2755,-1505 -2732.5,-1482.5 ; -2990,-1525 -2990,-1475 ; -2950,-3040 -2905,-2995 ; -2890,-3155 -2885,-3160 -2775,-3160 ; -2830,-3160 -2830,-3115 -2790,-3075 -2790,-3065 ; -2720,-1455 -2720,-1370 ; -2695,-3160 -2555,-3160
  Top Layer w11: -3845,-1700 -3845,-1500 -3750,-1405 -3750,-1360 -3800,-1310 -3800,-640 -3680,-520 -3590,-520 ; -3445,-660 -3445,-375
  Top Layer w14: -1845,-2520 -1845,-2255
  Bottom Layer w7: -3635,-1605 -3400,-1605 -3350,-1555 ; -3595,-515 -3460,-515 -3445,-530 ; -3260,-2755 -3260,-2605 -3215,-2560 -3210,-2560 ; -3210,-2760 -3210,-2635 -3190,-2615 ; -3165,-2715 -3165,-2710 -3070,-2615 ; -3095,-2755 -3095,-2705 -3015,-2625 -3015,-2620 ; -3035,-2725 -3035,-2715 -2945,-2625 -2930,-2625 ; -1920,-2000 -1915,-1995 -1825,-1995 -1790,-2030 ; -1510,-2155 -1510,-2160 -1460,-2210 -1245,-2210 ; -1385,-2790 -1360,-2765 -1360,-2720
  Bottom Layer w10: -4095,-2625 -4095,-2560

## Silkscreen, mask and mechanical layers (free items; w line width, h text height)
Top Overlay:
  lines w15.75: -7685,-3350 0,-3350 0,0 -7685,0 -7685,-3350

## Text inside footprints (layer, text, board x,y; h text height)
C230: Top Overlay "+" at -7525.47,-1316.81 h59.06 r90
C236: Top Overlay "+" at -7550.47,-616.81 h59.06 r90
C635: Top Overlay "+" at -3366.81,-2889.53 h59.06
C636: Top Overlay "+" at -3093.19,-3080.47 h59.06 r180
C820: Top Overlay "+" at 48.19,-884.53 h59.06
C903: Top Overlay "+" at -349.53,-1343.19 h59.06 r270
C906: Top Overlay "+" at -1605,-1035 h59.06 r270
P200: Top Overlay "1" at -6657.01,-160 h39.37 r180; Top Overlay "3" at -6818.43,-157.26 h39.37 r180
P201: Top Overlay "3" at -3958.43,-157.26 h39.37 r180; Top Overlay "1" at -3797.01,-160 h39.37 r180
P202: Top Overlay "1" at -6227.01,-160 h39.37 r180; Top Overlay "3" at -6388.43,-157.26 h39.37 r180
P203: Top Overlay "3" at -5578.43,-157.26 h39.37 r180; Top Overlay "1" at -5417.01,-160 h39.37 r180
P204: Top Overlay "3" at -4818.43,-157.26 h39.37 r180; Top Overlay "1" at -4657.01,-160 h39.37 r180
P400: Top Overlay "3" at -5781.57,-3252.74 h39.37; Top Overlay "1" at -5942.99,-3250 h39.37
P401: Top Overlay "3" at -6541.57,-3252.74 h39.37; Top Overlay "1" at -6702.99,-3250 h39.37
P402: Top Overlay "2" at -5095,-3150 h50; Top Overlay "1" at -5075,-3250 h50
P600: Top Overlay "1" at -1990,-3250 h50; Top Overlay "2" at -2010,-3150 h50; Top Overlay "5" at -1650,-3250 h50; Top Overlay "6" at -1650,-3150 h50
P601: Top Overlay "3" at -3341.57,-3252.74 h39.37; Top Overlay "1" at -3502.99,-3250 h39.37
P602: Top Overlay "1" at -1480,-3250 h50
P603: Top Overlay "1" at -1180,-3250 h50
P604: Top Overlay "7" at -415.28,-3250 h39.37; Top Overlay "1" at -682.99,-3250 h39.37
P900: Top Overlay "2" at -1340,-610 h50 r180; Top Overlay "1" at -1340,-510 h50 r180; Top Overlay "9" at -1880,-510 h50 r180; Top Overlay "10" at -1880,-610 h50 r180